# Altium PCB PCB1.PcbDoc
Units mm, origin at the board's own origin, x right, y up, seen from the top; angles counter-clockwise.
Board outline 100 x 100 mm, 4 copper layers (Top Layer, Internal Plane 1, Internal Plane 2, Bottom Layer), stack 0.462 mm thick; 31 components, 16 nets, 101 pads, 0 vias.
Unrouted connection lines stored in the file: 1.
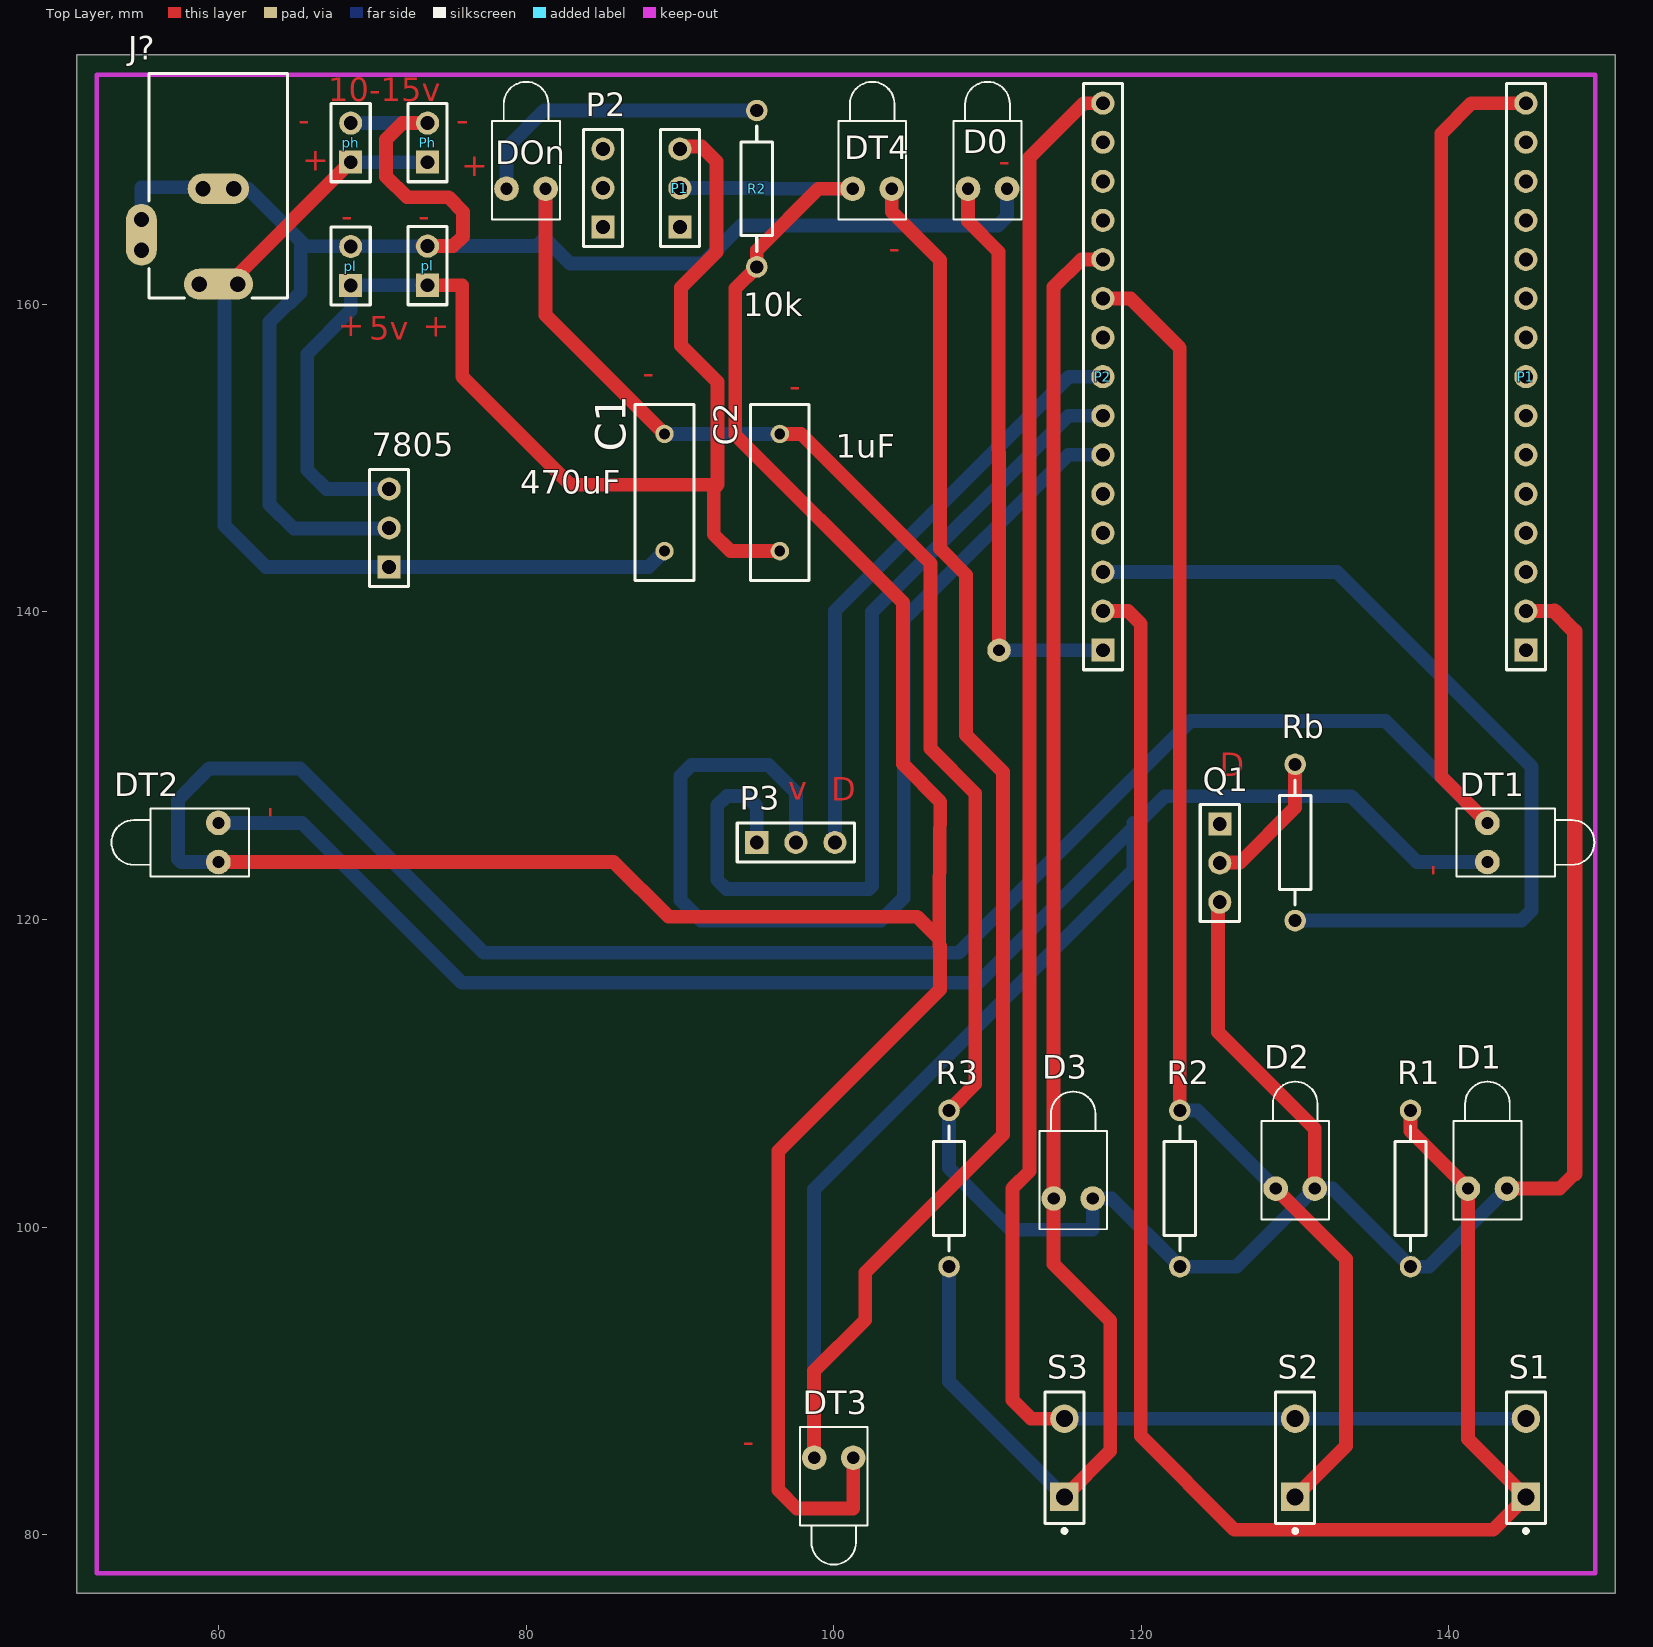
[diagram p0: Top Layer view]
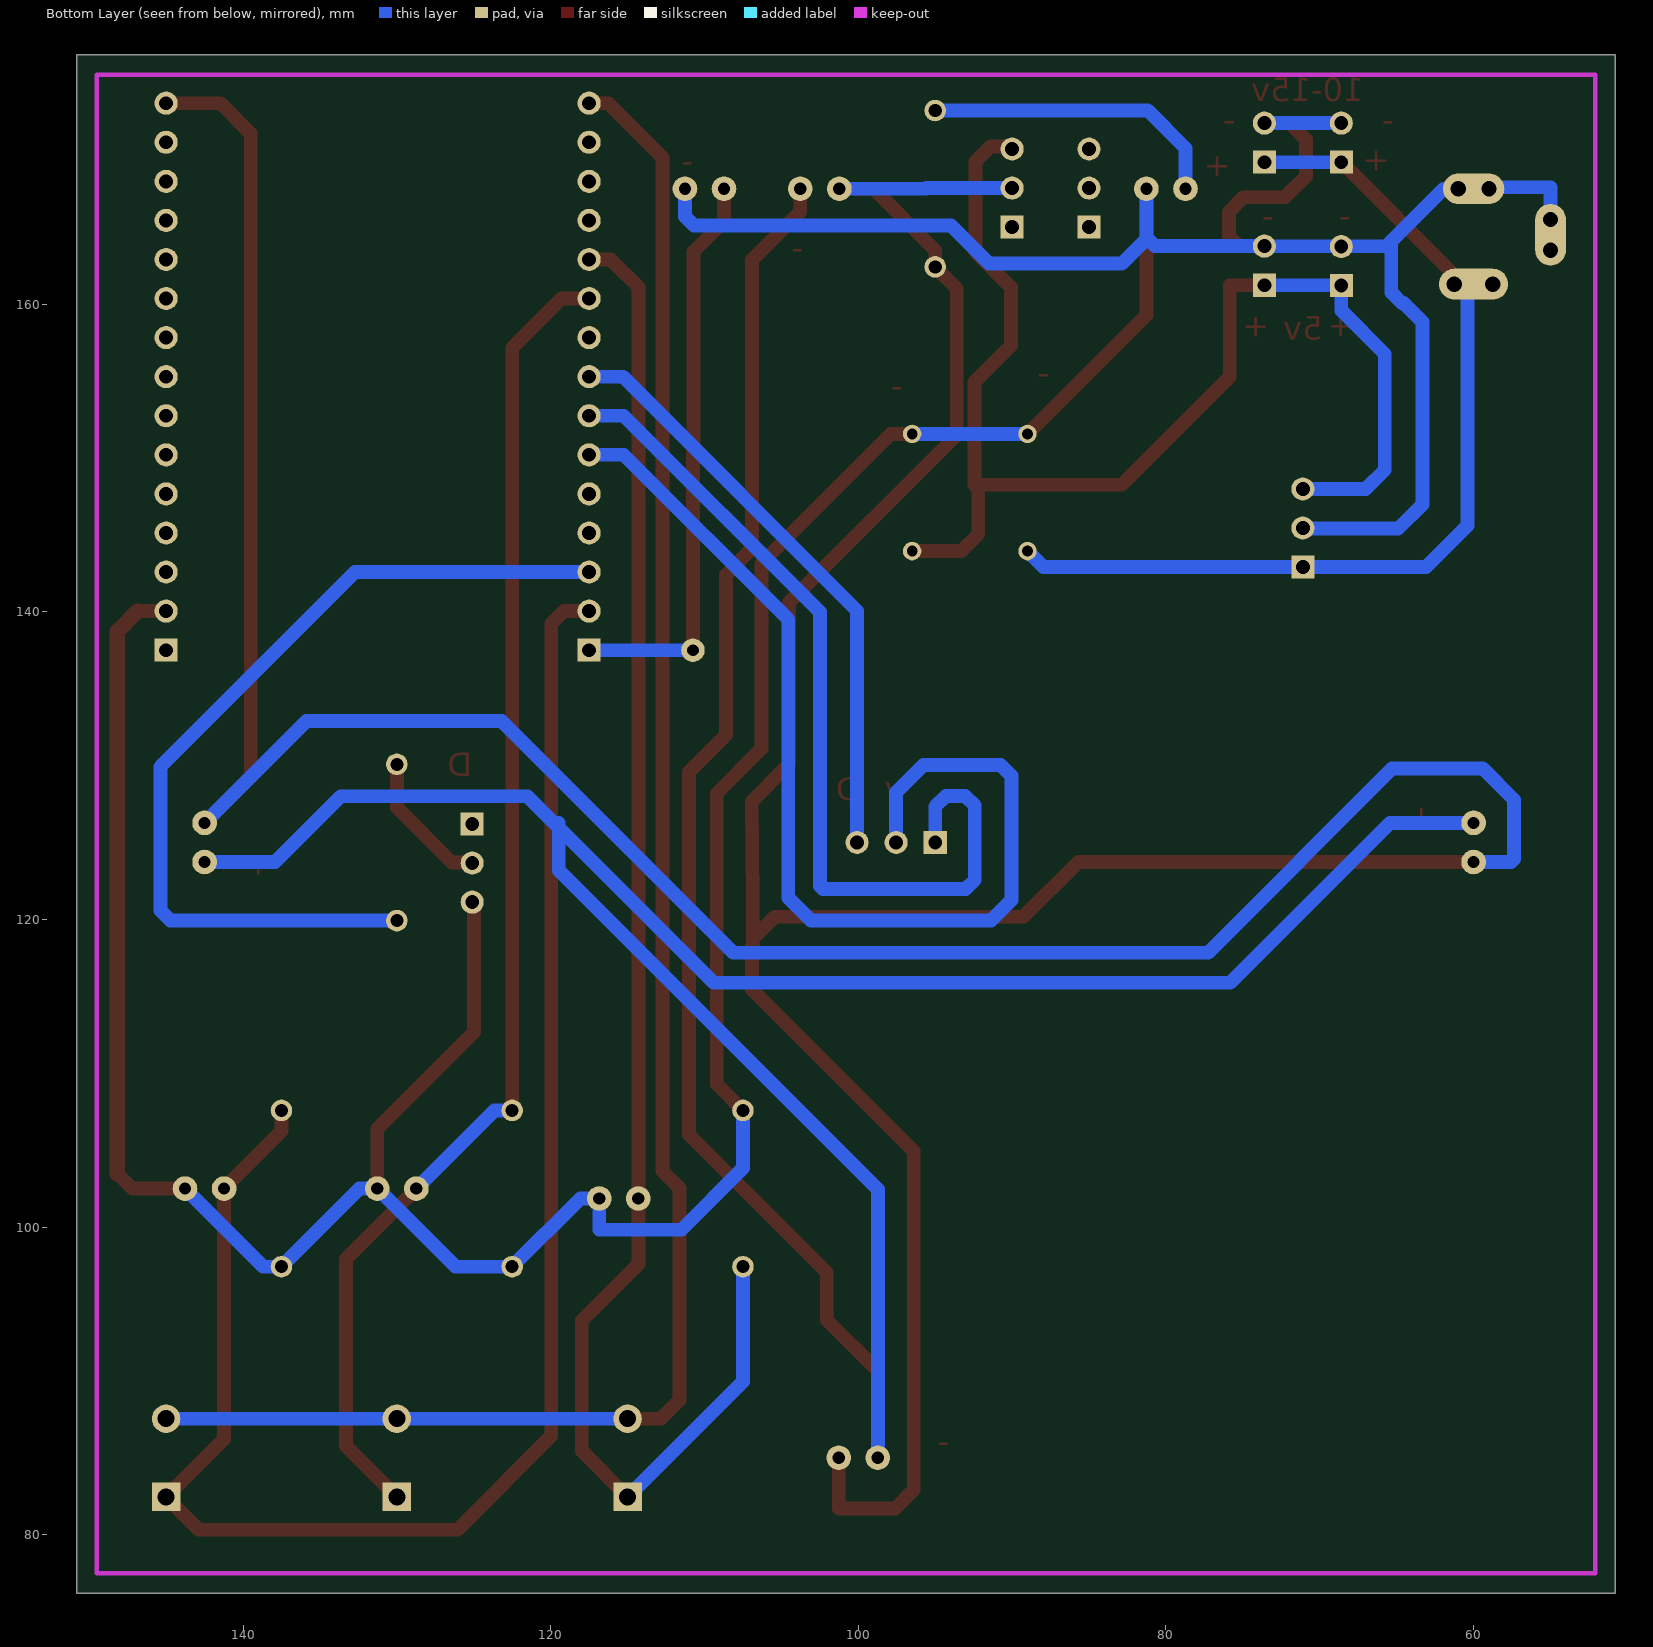
[diagram p1: Bottom Layer view, seen from below]
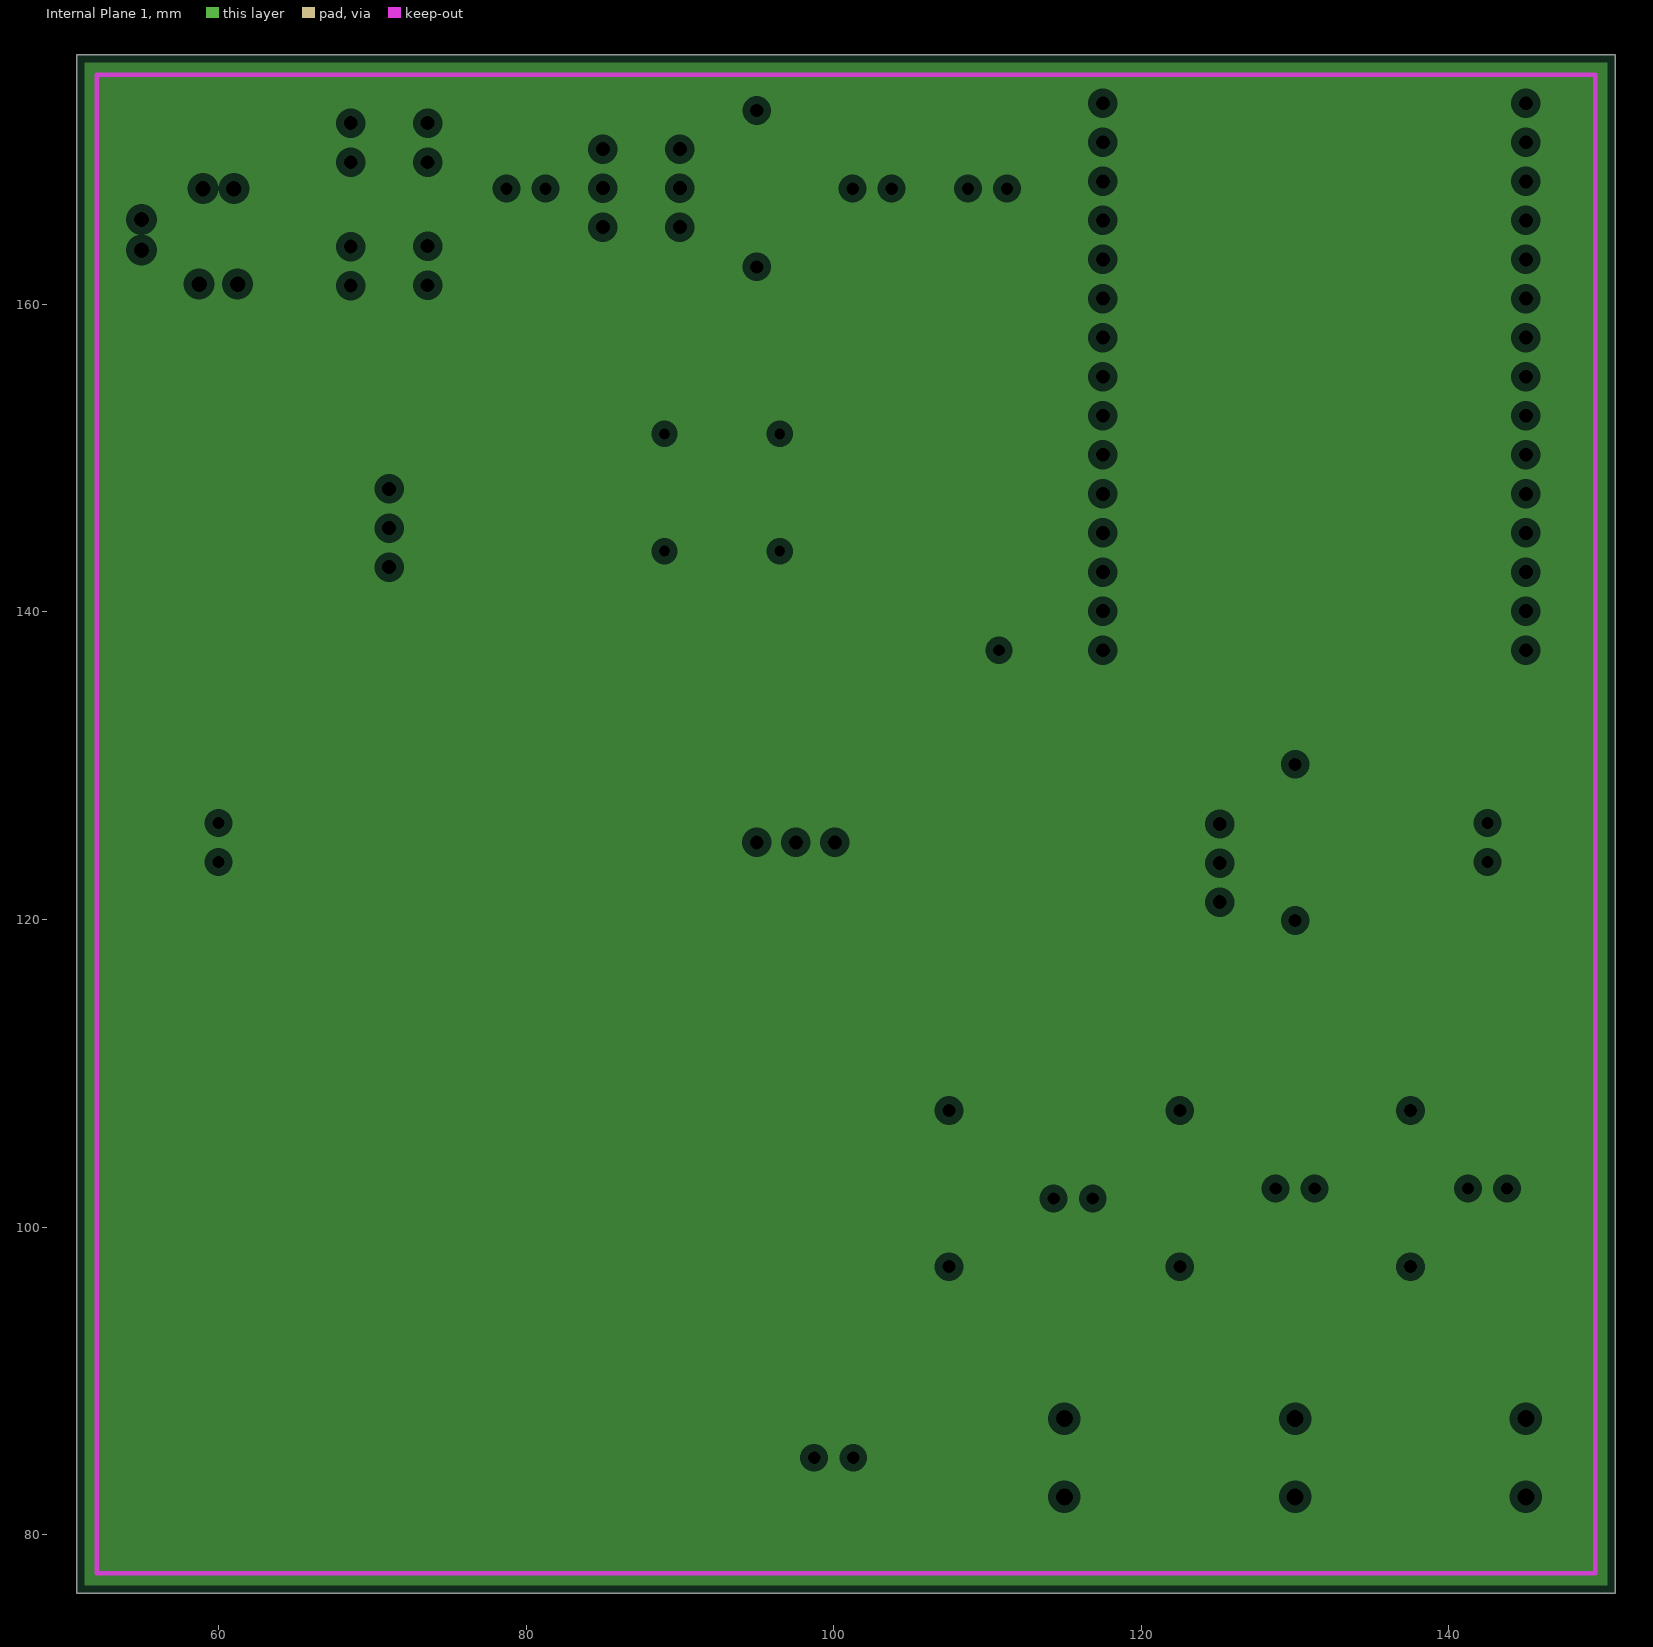
[diagram p2: Internal Plane 1, clearances drawn from the general rule]
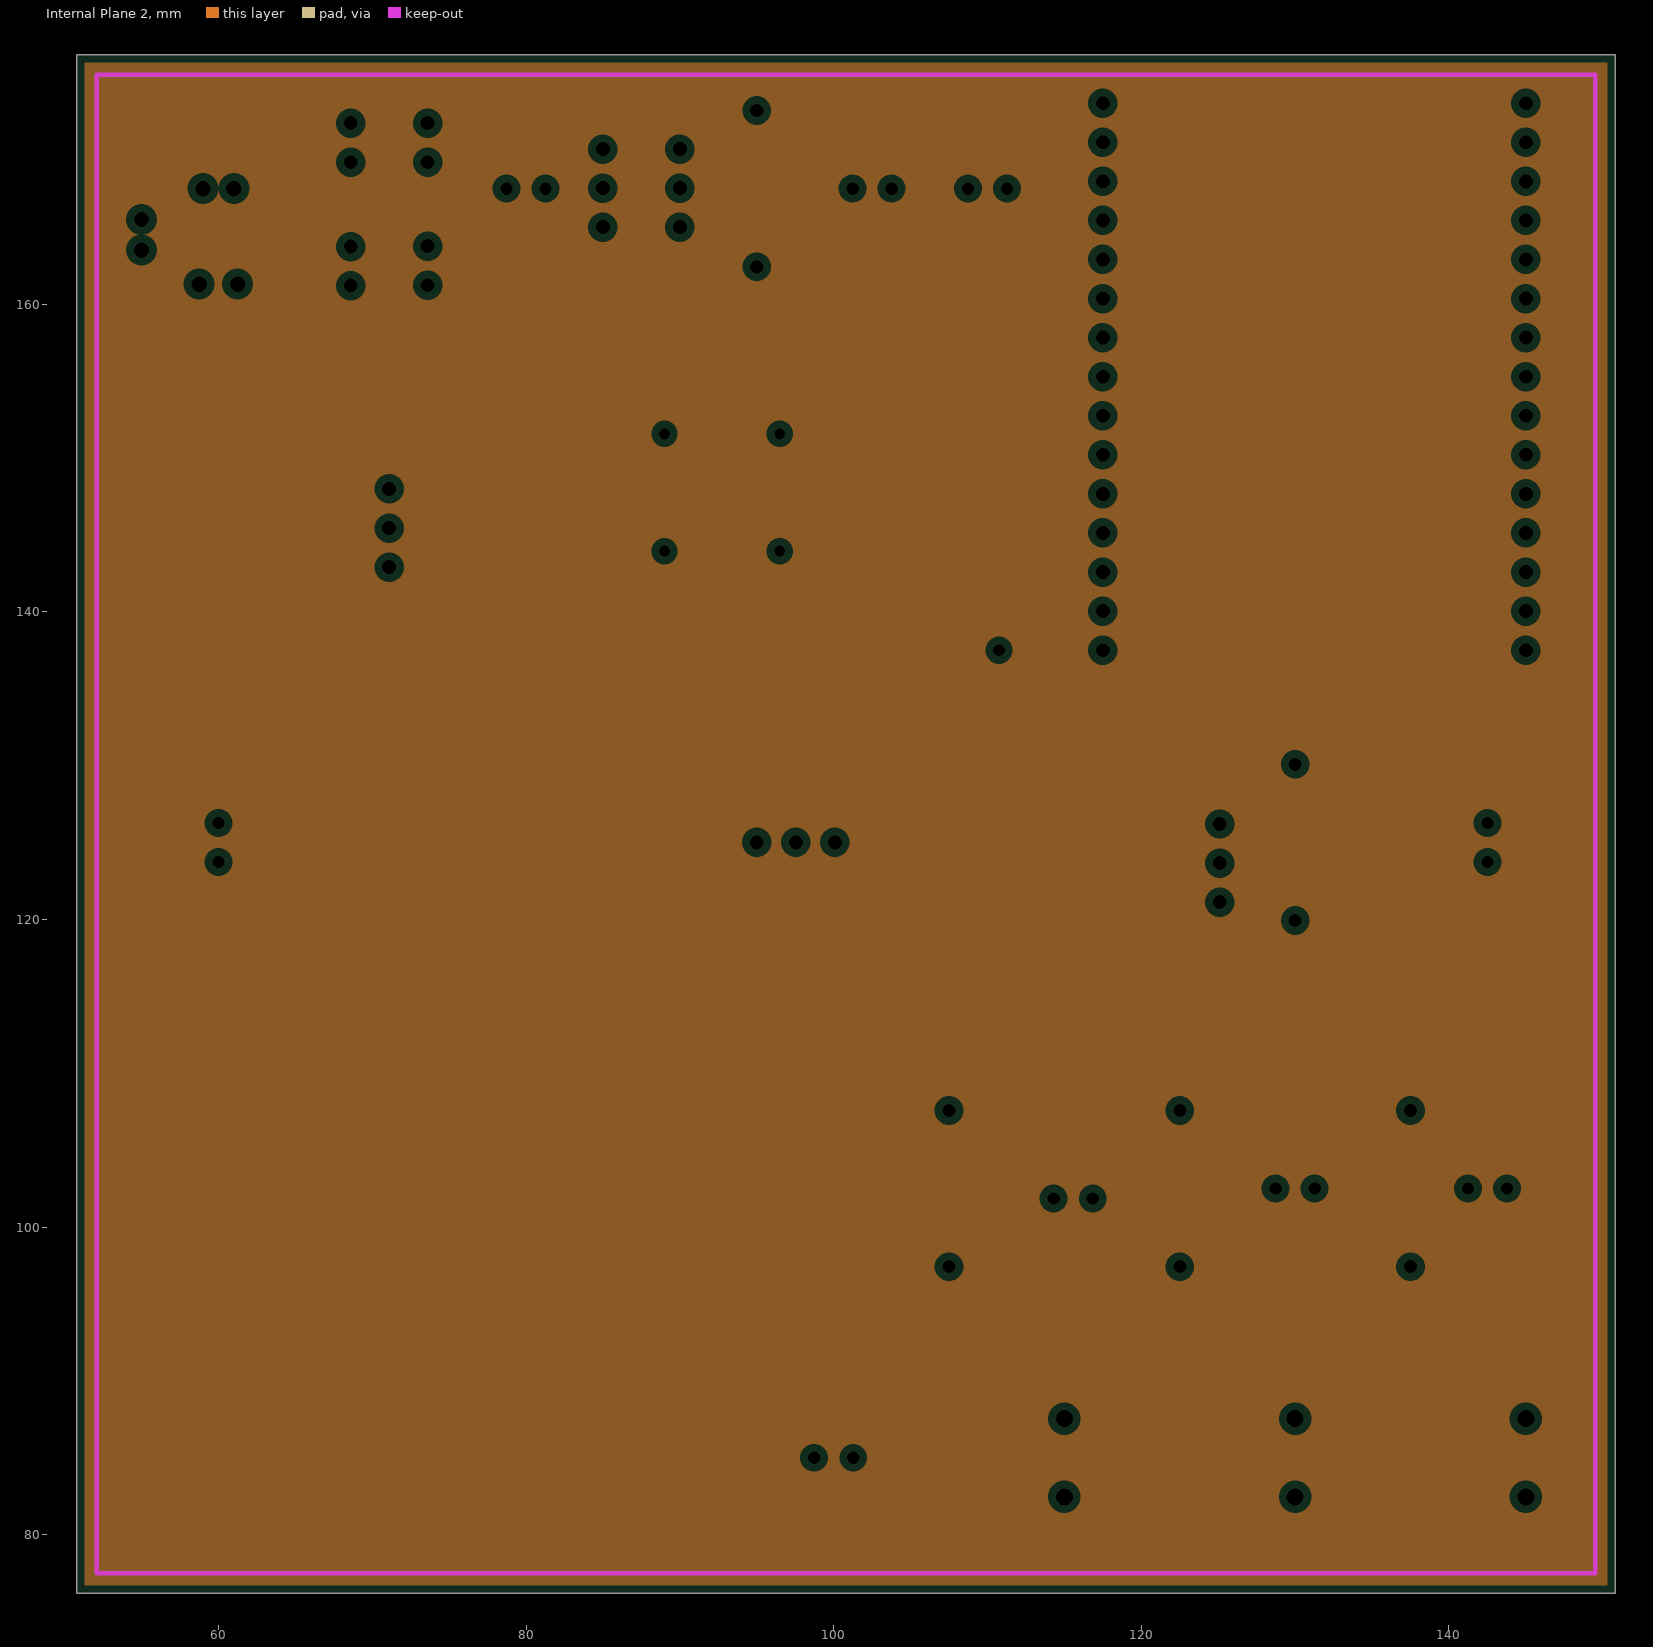
[diagram p3: Internal Plane 2, clearances drawn from the general rule]

## Layer stack, top to bottom
Top Solder: solder mask 0.0102, Solder Resist, Dk 3.5
Top Layer: signal copper 0.0356
Internal Plane 1: plane copper 0.0356
Internal Plane 2: plane copper 0.0356
Dielectric 1: dielectric 0.32, FR-4, Dk 4.8
Bottom Layer: signal copper 0.0356
Bottom Solder: solder mask 0.0102, Solder Resist, Dk 3.5

## Board outline
50.8,76.2 150.8,76.2 150.8,176.2 50.8,176.2

## Design rules (kind name [scope] priority, off if disabled: settings)
Clearance [All] p1: gap=0.2
PlaneClearance [All] p1: clearance=0.508
PlaneConnect [All] p1: planeconnectstyle=Relief reliefexpansion=0.508 reliefentries=4 reliefconductorwidth=0.254 reliefairgap=0.254
PolygonConnect [All] p1: connectstyle=Relief reliefconductorwidth=0.254 reliefentries=4 polygonreliefangle="90 Angle" airgapwidth=0.254
RoomDefinition Sheet1 [InComponentClass('Sheet1')] p1: confinementstyle=ConfineIn formatcopy=TRUE lockcomponents=FALSE outline 162.5,62.775 35.475,62.775 35.475,181.102 162.5,181.102
RoutingVias [All] p1: holewidth=0.8 width=1.6 viastyle="Through Hole" minholewidth=0.711 minwidth=1.27 maxholewidth=0.711 maxwidth=1.27
SolderMaskExpansion [All] p1: expansion=0.102
Width [All] p1: maxlimit=1 minlimit=0.8 preferedwidth=0.9
28 further rules are at their usual default settings.

## Classes and differential pairs
component class Sheet1: 1N5338BRL 470uf 7805 C1 C2 D0 D1 D2 D3 DOn DT1 DT2 DT3 DT4 J? P1 P2 P3 Ph pl Q1 R1 R2 R3 Rb S1 S2 S3

## Components (designator, comment, footprint, x,y, rotation, side; value= is the part's Value field where it differs from the comment)
7805 "Header 3" HDR1X3 71.1,142.9 r90 top
C1 "470uF" RAD-0.3 89,147.75 r90 top
C2 "1uF" RAD-0.3 96.5,147.75 r90 top
D0 "LED1" LED-1 110,167.5 r90 top
D1 "LED1" LED-1 142.5,102.5 r90 top
D2 "LED1" LED-1 130,102.5 r90 top
D3 "LED1" LED-1 115.57,101.854 r90 top
DOn "LED1" LED-1 80,167.5 r90 top
DT1 "LED1" LED-1 142.5,125 r0 top
DT2 "LED1" LED-1 60,125 r180 top
DT3 "LED1" LED-1 100,85 r270 top
DT4 "LED1" LED-1 102.5,167.5 r90 top
J? "PWR2.5" KLD-0202 60,175 r270 top
P1 "uf" HDR1X3 90,165 r90 top
P1 "Header 15" HDR1X15 145,137.5 r90 top
P2 "ul" HDR1X3 85,165 r90 top
P2 "Header 15" HDR1X15 117.5,137.5 r90 top
P3 "IrRECV" HDR1X3 95,125 r0 top
ph "Header 2" HDR1X2 68.6,169.225 r90 top
Ph "Header 2" HDR1X2 73.6,169.225 r90 top
pl "Header 2" HDR1X2 68.6,161.2 r90 top
pl "Header 2" HDR1X2 73.6,161.225 r90 top
Q1 "Header 3" HDR1X3 125.1,126.2 r270 top
R1 "Res2" AXIAL-0.4 137.5,102.5 r90 top
R2 "10k" AXIAL-0.4 95,167.5 r90 top
R2 "Res2" AXIAL-0.4 122.5,102.5 r90 top
R3 "Res2" AXIAL-0.4 107.5,102.5 r90 top
Rb "Res2" AXIAL-0.4 130,125 r90 top
S1 "SW-PB" SPST-2 145,85 r90 top
S2 "SW-PB" SPST-2 130,85 r90 top
S3 "SW-PB" SPST-2 115,85 r90 top

## Footprints (in the part's own frame and the unit in brackets; to place one, negate y for a bottom-side part, rotate by r counter-clockwise, add the part's x,y. Pads: shape width x height; smd on the part's side, far side on the other; paste and mask are expansions set on the pad)
AXIAL-0.4 [mm] "Axial Device, Thru-Hole; 2 Leads; 0.4 in Pin Spacing"
  round 1.4 hole 0.85: 1(-5.08,0) 2(5.08,0)
  silkscreen extent -4.06,-1.02 4.06,1.02
HDR1X2 [mm] "Connector; Header; 2 Position"
  rect 1.5x1.5 hole 0.9: 1(0,0)
  round 1.5 hole 0.9: 2(2.54,0)
  silkscreen extent -1.27,-1.27 3.81,1.27
HDR1X3 [mm] "Connector; Header; 3 Position"
  rect 1.5x1.5 hole 0.9: 1(0,0)
  round 1.5 hole 0.9: 2(2.54,0) 3(5.08,0)
  silkscreen extent -1.27,-1.27 6.35,1.27
HDR1X15 [mm] "Connector; Header; 15 Position"
  rect 1.5x1.5 hole 0.9: 1(0,0)
  round 1.5 hole 0.9: 2(2.54,0) 3(5.08,0) 4(7.62,0) 5(10.16,0) 6(12.7,0) 7(15.24,0) 8(17.78,0) 9(20.32,0) 10(22.86,0) 11(25.4,0) 12(27.94,0) 13(30.48,0) 14(33.02,0) 15(35.56,0)
  silkscreen extent -1.27,-1.27 36.83,1.27
KLD-0202 [mm] "DC Power Jack, 2.5mm, KLD Series, PCB Mount"
  oval 2x4.5 all layers, no hole: 1(13.7,0)
  round 1.5 hole 1: 1A(13.7,-1.25) 1B(13.7,1.25) 2A(7.5,-1) 2B(7.5,1) 3A(9.5,-5) 3B(11.5,-5)
  oval 2x4 all layers, no hole: 2(7.5,0)
  oval 4x2 all layers, no hole: 3(10.5,-5)
  silkscreen extent 0,-4.5 14.6,4.5
LED-1 [mm] "LED; 2 Leads"
  round 1.6 hole 0.8: 1(0,1.27) 2(0,-1.27)
  silkscreen extent -2,-2.2 6.95,2.2
RAD-0.3 [mm] "Radial Cap, Thru-Hole; 2 Leads; 0.3 in Pin Spacing"
  round 1.2 hole 0.7: 1(-3.81,0) 2(3.81,0)
  silkscreen extent -5.72,-1.91 5.71,1.9
SPST-2 [mm] "Switch; 2 Leads"
  rect 1.85x1.85 hole 1.1: 1(-2.54,0)
  round 1.85 hole 1.1: 2(2.54,0)
  silkscreen extent -4.89,-1.27 4.28,1.27

## Part data
7805 Q1: "Header, 3-Pin"
C1 C2: library part Cap, "Capacitor"
D0 D1 D2 D3 DOn DT1 DT2 DT3 DT4: "Typical RED GaAs LED"
J?: "Low Voltage Power Supply Connector"
P1 P2 P3: library part "Header 3", "Header, 3-Pin"
P1 P2: "Header, 15-Pin"
ph Ph pl pl: "Header, 2-Pin"
R1 R2 R3 Rb: "Resistor"
R2: library part Res2, "Resistor"
S1 S2 S3: "Switch"

## Free pads (board coordinates)
  round 1.524 hole 0.762: 2(110.75,137.5)

## Nets (pads, with @x,y where several pads share a name; then routed paths per layer and width w, separated by ;. In a path a pad name is that pad's centre, name@x,y a point inside that pad or via, vN(x,y) a via of type N, cw(c..) or ccw(c..) an arc to the next point about the centre after c; other vN are vias at no path point)
GND: 7805.2 C1.2 C2.2 D0.2 D1.2 D2.2 D3.2 DOn.2 J?.2 J?.2A J?.2B J?.3 J?.3A J?.3B P1.2@145,140.04 Ph.2 ph.2 pl.2 Q1.3 R1.1 R2.1@122.5,97.42 R3.2 | length 313.9
  Top Layer w0.9: J?.2A J?.2 J?.2B ; pl.2@73.25,163.765 75.265,163.765 75.9,164.4 75.9,166 74.95,166.95 72.25,166.95 70.9,168.3 70.9,170.7 71.965,171.765 Ph.2 ; DOn.2 81.27,159.29 C1.2 ; C2.2 97.89,151.56 106.3,143.15 106.3,131.1 109.2,128.2 109.2,109.28 R3.2 ; Q1.3@124.993,121.1 124.993,112.682 131.27,106.405 D2.2 ; D1.2 147.2,102.5 148.175,103.475 ; P1.2@145,140.04 146.86,140.04
  Top Layer w1: 146.86,140.04 148.175,138.725 148.175,103.475
  Bottom Layer w0.9: J?.3A 55,167.6 J?.2@58.9,167.6 ; J?.2A J?.2 J?.2B 61.938,167.5 65.35,164.088 ; ph.2 Ph.2 ; 7805.2@71.1,145.4 64.9,145.4 63.325,146.975 63.325,158.84 64.556,160.071 64.671,160.071 65.35,160.75 65.35,164.088 ; C1.2 92.735,151.56 C2.2 ; R3.2 107.5,103.825 111.503,99.822 116.84,99.822 D3.2 118.066,101.854 122.5,97.42 126.19,97.42 D2.2 132.42,102.5 R1.1 138.69,97.42 D1.2 ; D0.2 111.27,165.695 110.675,165.1 93.975,165.1 91.505,162.63 82.87,162.63 81.27,164.23 DOn.2 81.27,164.32 80.715,163.765 73.6,163.765 68.6,163.74 65.672,163.765 65.35,164.088
Net7805_1: 7805.1 C1.1 J?.1 J?.1A J?.1B Ph.1 ph.1 | length 64.7
  Top Layer w0.9: J?.1B 61.25,161.875 ph.1
  Bottom Layer w0.9: J?.1A J?.1 J?.1B 60.4,160.45 60.4,145.6 63.1,142.9 7805.1 87.96,142.9 C1.1 ; ph.1 Ph.1
Net7805_3: 7805.3 C2.1 P1.3@90,170.08 pl.1 | length 85.9
  Top Layer w0.9: pl.1@73.25,161.225 75.85,161.225 75.85,155.3 82.9,148.25 92.45,148.25 ; P1.3@90,170.08 90.17,170.25 91.4,170.25 92.375,169.275 92.375,163.375 90.075,161.075 90.075,157.3 92.45,154.925 92.45,148.25 ; C2.1 93.296,143.94 92.2,145.036 92.2,148 92.45,148.25
  Bottom Layer w0.9: 7805.3 67.02,147.98 65.775,149.225 65.775,156.75 68.6,159.575 68.6,161.225 pl.1@73.6,161.225
NetD0_1: D0.1 P2.1@117.5,137.5 pad.2 | length 37.6
  Top Layer w0.9: D0.1 108.73,165.395 110.725,163.4 pad.2
  Bottom Layer w0.9: pad.2 P2.1@117.5,137.5
NetD1_1: D1.1 P2.2@117.5,140.04 R1.2 S1.1 | length 112.3
  Top Layer w0.9: P2.2@117.5,140.04 119.135,140.04 119.964,139.211 119.964,86.411 126.06,80.315 142.855,80.315 S1.1 141.23,86.23 D1.1 137.5,106.23 R1.2
NetD2_1: D2.1 P2.10 R2.2@122.5,107.58 S2.1 | length 87.5
  Top Layer w0.9: P2.10 119.29,160.36 122.5,157.15 R2.2@122.5,107.58 ; D2.1 133.3,97.93 133.3,85.76 S2.1
  Bottom Layer w0.9: R2.2@122.5,107.58 123.65,107.58 D2.1
NetD3_1: D3.1 P2.11 R3.1 S3.1 | length 103.4
  Top Layer w0.9: S3.1 117.975,85.435 117.975,93.925 114.3,97.6 D3.1 114.3,161.1 116.1,162.9 P2.11
  Bottom Layer w0.9: R3.1 107.5,89.96 S3.1
NetDOn_1: DOn.1 R2.2@95,172.58 | length 19.9
  Bottom Layer w0.9: DOn.1 78.73,170.13 81.18,172.58 R2.2@95,172.58
NetDT1_1: DT1.1 DT2.1 DT3.1 DT4.1 P1.2@90,167.54 P1.15 R2.1@95,162.42 | length 326.6
  Top Layer w0.9: DT2.1 85.695,123.73 89.25,120.175 105.425,120.175 106.865,118.735 ; DT4.1 99,167.5 95,163.5 95,162.42 93.6,161.02 93.6,151.5 104.5,140.6 104.5,130.1 104.6,130 106.931,127.62 106.865,121.376 106.865,118.735 ; DT3.1 101.27,81.7 97.6,81.7 96.4,82.9 96.4,104.95 106.9,115.45 106.9,118.275 106.865,118.31 106.865,118.735 ; DT1.1 139.5,129.27 139.5,171.1 141.46,173.06 P1.15
  Bottom Layer w0.9: DT2.1 57.57,123.73 57.375,123.925 57.375,127.775 59.4,129.8 65.3,129.8 77.275,117.825 108.125,117.825 123.2,132.9 135.87,132.9 DT1.1 ; P1.2@90,167.54 95.58,167.54 95.62,167.5 DT4.1
NetDT1_2: DT1.2 DT2.2 DT3.2 DT4.2 Q1.1 | length 234
  Top Layer w0.9: DT3.2 98.73,90.63 102.05,93.95 102.05,97.05 111,106 111,129.575 108.6,131.975 108.6,142.406 106.9,144.106 106.9,162.875 103.77,166.005 DT4.2
  Bottom Layer w0.9: DT2.2 65.43,126.27 75.825,115.875 109.375,115.875 121.5,128 133.65,128 137.92,123.73 DT1.2 ; DT3.2 98.73,102.43 119.47,123.17 119.47,126.27
NetP2_3: P2.3@117.5,142.58 Rb.1 | length 58.1
  Bottom Layer w0.9: P2.3@117.5,142.58 132.72,142.58 145.375,129.925 145.375,120.575 144.72,119.92 Rb.1
NetP2_6: P2.6 P3.2 | length 71
  Bottom Layer w0.9: P3.2 97.54,128.26 95.775,130.025 90.75,130.025 90.05,129.325 90.05,121.25 91.375,119.925 103.075,119.925 104.55,121.4 104.55,139.5 115.25,150.2 P2.6
NetP2_7: P2.7 P3.1 | length 58.8
  Bottom Layer w0.9: P3.1 95,127.325 94.3,128.025 93.05,128.025 92.425,127.4 92.425,122.575 93.025,121.975 102.3,121.975 102.5,122.175 102.5,139.975 115.265,152.74 P2.7
NetP2_8: P2.8 P3.3 | length 38.8
  Bottom Layer w0.9: P3.3 100.08,140.065 115.295,155.28 P2.8
NetP2_15: P2.15 S1.2 S2.2 S3.2 | length 121.3
  Top Layer w0.9: S3.2 112.835,87.54 111.625,88.75 111.625,102.525 112.725,103.625 112.725,169.525 116.26,173.06 P2.15
  Bottom Layer w0.9: S3.2 S2.2 S1.2
NetQ1_2: Q1.2 Rb.2 | length 9.3
  Top Layer w0.9: Q1.2@125,123.7 126.43,123.7 130,127.27 Rb.2
pads on no net: P1.1 P1.3@145,142.58 P1.4 P1.5 P1.6 P1.7 P1.8 P1.9 P1.10 P1.11 P1.12 P1.13 P1.14 P2.1@85,165 P2.2@85,167.54 P2.3@85,170.08 P2.4 P2.5 P2.9 P2.12 P2.13 P2.14

## Keep-outs
Keep-Out Layer:
  lines w0.3: 52.1,77.5 52.1,174.9 149.5,174.9 149.5,77.5 52.1,77.5

## Other copper
Top Layer:
  text "10-15v" at 67.125,173.2 h1.52
  text "-" at 65.175,171.25 h1.52
  text "-" at 75.45,171.25 h1.52
  text "-" at 75.525,171.25 h1.52
  text "+" at 65.45,168.675 h1.52
  text "-" at 110.725,168.575 h1.52
  text "+" at 75.8,168.3 h1.52
  text "-" at 68,165 h1.52
  text "-" at 73,165 h1.52
  text "-" at 103.575,162.925 h1.52
  text "+" at 67.75,157.9 h1.52
  text "+" at 73.275,157.875 h1.52
  text "5v" at 69.8,157.675 h1.52
  text "-" at 87.575,154.775 h1.52
  text "-" at 97.125,153.95 h1.52
  text "D" at 125.1,129.3 h1.52
  text "v" at 97.05,127.775 h1.52
  text "D" at 99.825,127.7 h1.52
  text "-" at 63.95,126.575 h1.52 r90
  text "-" at 139.575,122.8 h1.52 r90
  text "-" at 94.1,85.325 h1.52

## Silkscreen, mask and mechanical layers (free items; w line width, h text height)
Drill Drawing:
  text "Drill Drawing." at 155.88,78.74 h1.52

## Dimensions
51.084,75.976 to 148.484,75.976 on Mechanical 1
52.1,77.5 to 52.1,174.9 on Mechanical 1